# EAGLE board rocketnet-daughter-16-lpkf (EAGLE 6.5.0)
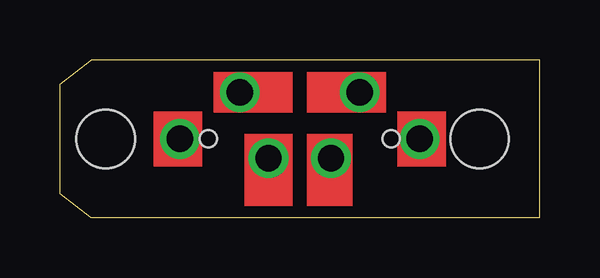
[diagram p0: board, top side]
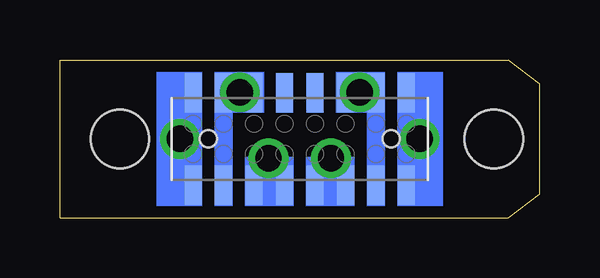
[diagram p1: board, bottom side, seen from below]

Size 20 x 6.6 mm. Coordinates in mm from the lower left corner, seen from the top.
Outline: 20,0 20,6.6 1.3,6.6 0,5.6 0,1 1.3,0 20,0
Copper layers (1*16): Top 0.035mm / dielectric 1.5mm / Bottom 0.035mm
Design rules "lpkf-s63-epl": minimum track width 10mil, minimum drill 0.35mm, track to track 8mil, track to pad 8mil, pad to pad 8mil, via to via 8mil, smd to smd 8mil, copper to edge 10mil, drill to drill 8mil, minimum pad ring 10mil, minimum via ring 8mil, stop-mask expansion 4mil, vias tented up to drill 0mil, thermal gap 10mil
Holes 2.44 mm at 17.5,3.3 1.9,3.3

## Footprints (pad centres in the part's own frame; a part is rotated, then mirrored left to right if it is on the bottom)
HARWIN-M50-31508-NO-HOLES = smd 0.71 x 1.65: 1 -4.445,-1.925; 2 -4.445,1.925; 3 -3.175,-1.925; 4 -3.175,1.925; 5 -1.905,-1.925; 6 -1.905,1.925; 7 -0.635,-1.925; 8 -0.635,1.925; 9 0.635,-1.925; 10 0.635,1.925; 11 1.905,-1.925; 12 1.905,1.925; 13 3.175,-1.925; 14 3.175,1.925; 15 4.445,-1.925; 16 4.445,1.925 | hole 0.71: 3.81,0; -3.81,0

## Placement (x,y rotation side)
E$2  [HARWIN-M50-31508-NO-HOLES]  10,3.3 0 bottom

## Library data of the parts
E$2 = rocketnet-connector

## Tracks (layer width: path | path; a pad name or v marks a point on that pad's centre or on a via)
S$1  (via drill 1.1)
  other vias: 12.5,5.25
S$2  (via drill 1.1)
  other vias: 15,3.3
S$4  (via drill 1.1)
  other vias: 11.3,2.5
S$5  (via drill 1.1)
  other vias: 8.7,2.5
S$6  (via drill 1.1)
  other vias: 7.5,5.25
S$7  (via drill 1.1)
  other vias: 5,3.3
(copper drawn outside any net)
  shapes: Bottom area x8, Top area x6

## Text on the board
Document: TOP VIEW (M50 on bottom of board) | B+ | AUX1 | AUX2 | AUX3 | AUX4 | B- | #2-56 nylock / (5/32" OD) | RX- | TX+ | RX+ | TX-